# Altium PCB TM.PcbDoc
Units mm, origin at the board's own origin, x right, y up, seen from the top; angles counter-clockwise.
Board outline 73.28 x 49.15 mm, 2 copper layers (Top Layer, Bottom Layer), stack 0.471 mm thick; 13 components, 12 nets, 50 pads, 0 vias.
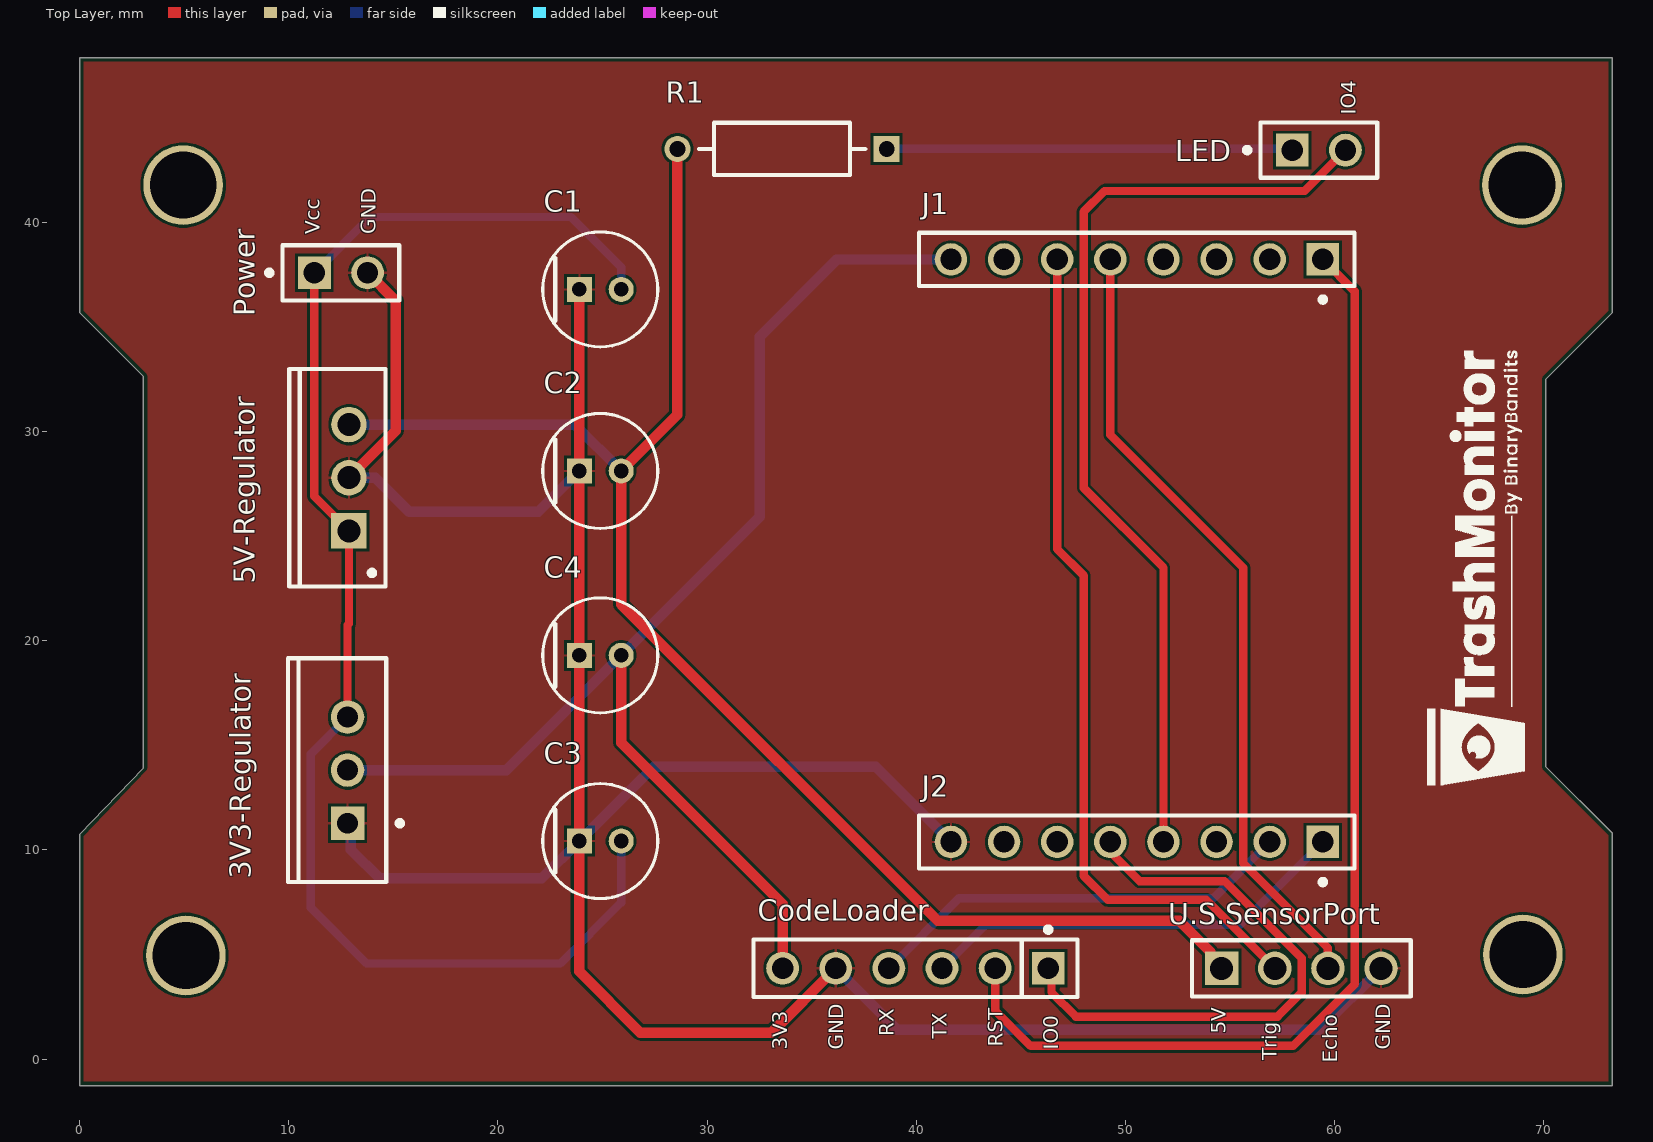
[diagram p0: Top Layer view]
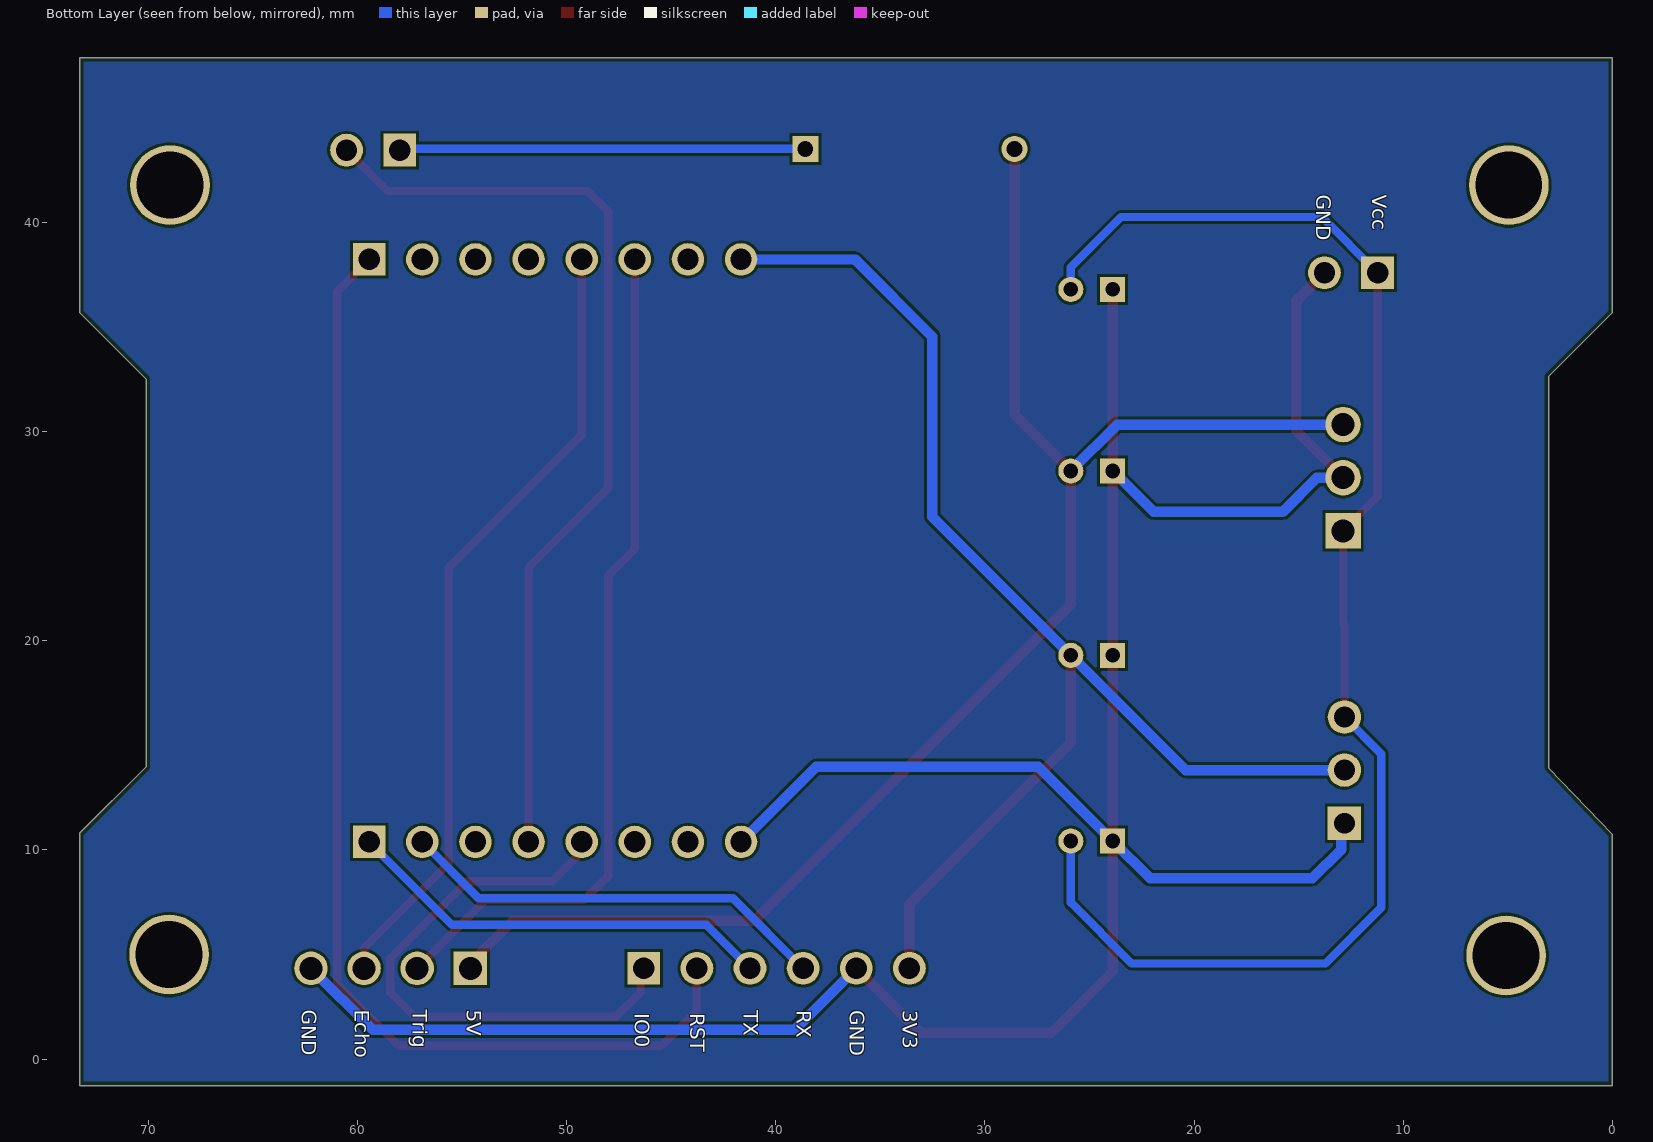
[diagram p1: Bottom Layer view, seen from below]
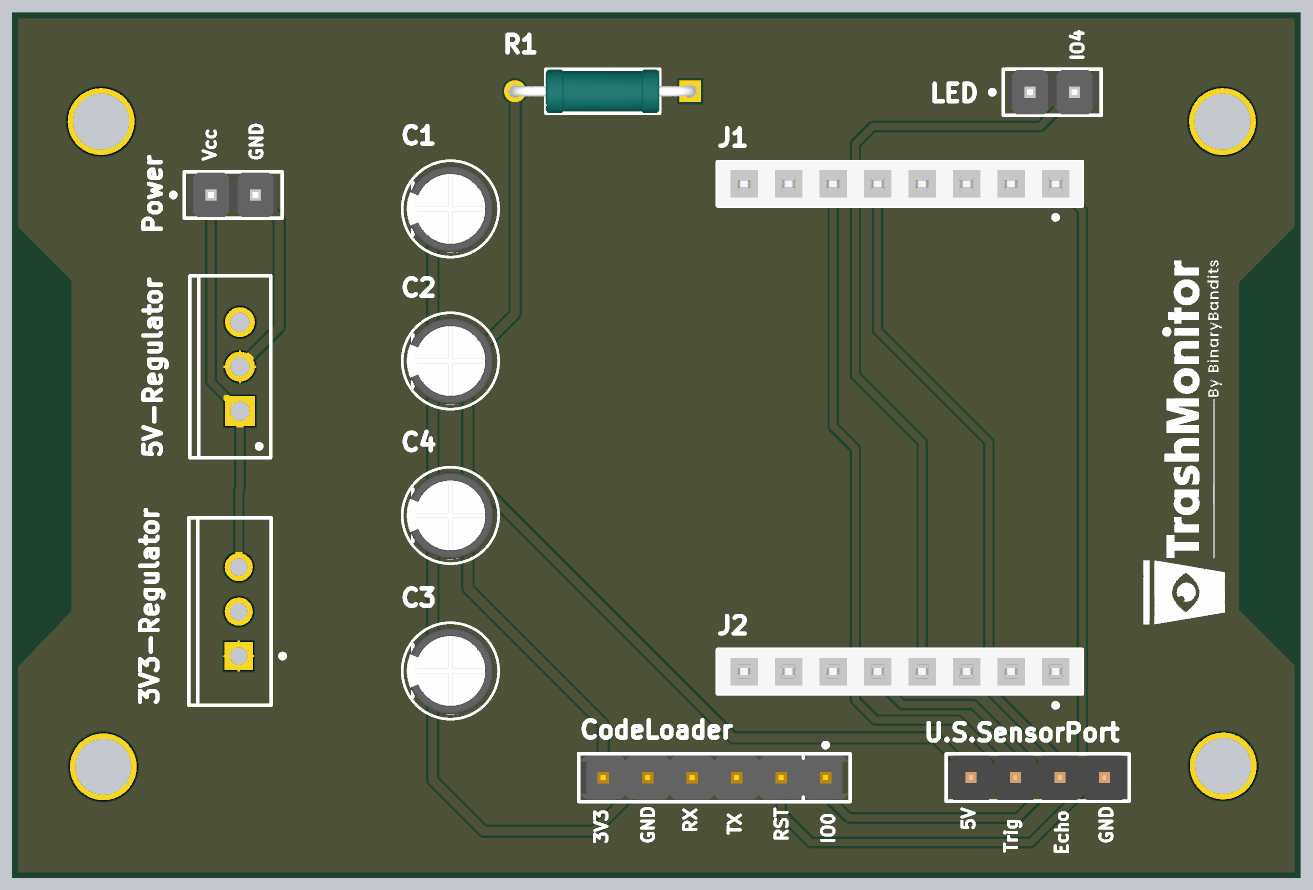
[diagram p2: 3D render of the assembled board from above, using the file's embedded part models]

## Layer stack, top to bottom
Top Solder: solder mask 0.0102, Solder Resist, Dk 3.8
Top Layer: signal copper 0.0356
Dielectric 1: dielectric 0.4, FR-4, Dk 4.5
Bottom Layer: signal copper 0.0356
Bottom Solder: solder mask 0.0102, Solder Resist, Dk 3.8

## Board outline
73.279,35.687 70.104,32.512 70.104,13.97 73.279,10.795 73.279,-1.27 0,-1.27 0,10.742 3.048,13.917 3.048,32.639 0,35.687 0,47.879 73.279,47.879

## Design rules (kind name [scope] priority, off if disabled: settings)
BoardOutlineClearance [All] p1: gap=0.2 ignorepadtopadclearanceinfootprint=FALSE
Clearance [All] p1: gap=0.127 ignorepadtopadclearanceinfootprint=FALSE except(0.25: Arc-Hole Track-Hole SMDPad-Hole THPad-Hole Via-Hole Fill-Hole Poly-Hole Region-Hole Text-Hole)
ComponentClearance [All] p1: gap=0.127 collisioncheckmode=3 verticalgap=0.127 showdistances=TRUE
DiffPairsRouting [All] p1: maxlimit=0.254 minlimit=0.127 mostfreqgap=0.127 toplayer_minwidth=0.127 toplayer_maxwidth=25.4 toplayer_prefwidth=0.127 bottomlayer_minwidth=0.127 bottomlayer_maxwidth=25.4 bottomlayer_prefwidth=0.127 maxuncoupledlength=12.7
Height [All] p1: minheight=0 maxheight=1816.048 prefheight=12.7
HoleSize [All] p1: absolutevalues=TRUE maxlimit=6.3 minlimit=0.3 maxpercent=80.000 minpercent=20.000
HoleToHoleClearance [All] p1: gap=0.25 allowstackedmicrovias=FALSE
MinimumAnnularRing [All] p1: minimumring=0.3
MinimumSolderMaskSliver [All] p1: minsoldermaskwidth=0
PlaneClearance [All] p1: clearance=0.127
PlaneConnect PlaneConnectPowerPads [InPadClass('PowerPads')] p1: planeconnectstyle=Direct reliefexpansion=0.508 reliefentries=4 reliefconductorwidth=0.254 reliefairgap=0.254
PlaneConnect [All] p2: pad.planeconnectstyle=Relief pad.reliefexpansion=0.3 pad.reliefentries=4 pad.reliefconductorwidth=0.127 pad.reliefairgap=0.127 via.planeconnectstyle=Direct via.reliefexpansion=0.3 via.reliefentries=4 via.reliefconductorwidth=0.127 via.reliefairgap=0.127
PolygonConnect PolygonConnectPowerPads [All vs (InPadClass('PowerPads'))] p1: connectstyle=Direct reliefconductorwidth=0.254 reliefentries=4 polygonreliefangle="90 Angle" airgapwidth=0.254
PolygonConnect [All] p2: thpad.connectstyle=Relief thpad.reliefconductorwidth=0.127 thpad.reliefentries=4 thpad.polygonreliefangle="90 Angle" thpad.airgapwidth=0.127 smdpad.connectstyle=Relief smdpad.reliefconductorwidth=0.127 smdpad.reliefentries=4 smdpad.polygonreliefangle="90 Angle" smdpad.airgapwidth=0.127 via.connectstyle=Direct via.reliefconductorwidth=0.127 via.reliefentries=4 via.polygonreliefangle="90 Angle" via.airgapwidth=0.127
RoutingVias [All] p1: holewidth=0.3 width=0.6 viastyle="Through Hole" minholewidth=0.3 minwidth=0.6 maxholewidth=0.6 maxwidth=6.6
SilkToSilkClearance [All] p1: silktosilkclearance=0
SolderMaskExpansion [All] p1: expansion=0.075 istentingtop=FALSE
Width Width_1 [InNet('5V') or InNet('3V3') or InNet('GND')] p1: maxlimit=0.6 minlimit=0.5 preferedwidth=0.5
Width [All] p2: maxlimit=0.5 minlimit=0.4 preferedwidth=0.4
21 further rules are at their usual default settings.

## Components (designator, comment, footprint, x,y, rotation, side; value= is the part's Value field where it differs from the comment)
3V3-Regulator "LM1117T-3.3/NOPB" NDE0003A 12.81,13.814 r90 top (schematic designator "3V3 Regulator")
5V-Regulator "L7805CV" TO220 12.876,27.795 r90 top (schematic designator "5V Regulator")
C1 "EEUHD1H330" FP-RAD-TH-D_5_0_5-L_11_1-MFG 24.892,36.797 r0 top
C2 "EEUHD1H330" FP-RAD-TH-D_5_0_5-L_11_1-MFG 24.892,28.117 r0 top
C3 "EEUHD1H330" FP-RAD-TH-D_5_0_5-L_11_1-MFG 24.892,10.424 r0 top
C4 "EEUHD1H330" FP-RAD-TH-D_5_0_5-L_11_1-MFG 24.892,19.302 r0 top
CodeLoader "22-28-4063" FP-22-28-4063-MFG 39.958,4.34 r180 top
J1 "PPPC081LFBN-RC" SLIN-PPPC081LFBN-RC_V 50.546,38.233 r180 top
J2 "PPPC081LFBN-RC" SLIN-PPPC081LFBN-RC_V 50.546,10.383 r180 top
LED "M20-9990246" FP-M20-9990246-MFG 59.247,43.457 r0 top (schematic designator "Indicator Light")
Power "M20-9990246" FP-M20-9990246-MFG 12.495,37.592 r0 top
R1 "MRS25000C9530FCT00" FP-MRS25-MFG 33.581,43.514 r180 top (schematic designator R6)
U.S.SensorPort "61300411121" 61300411121 58.409,4.34 r0 top (schematic designator "US Sensor port")

## Footprints (in the part's own frame and the unit in brackets; to place one, negate y for a bottom-side part, rotate by r counter-clockwise, add the part's x,y. Pads: shape width x height; smd on the part's side, far side on the other; paste and mask are expansions set on the pad)
61300411121 [mm] "Pin Header, pitch 2.54 mm, THT, Vertical, single row, 4p"
  rect 1.6x1.6 hole 1.1: 1(-3.81,0)
  round 1.6 hole 1.1: 2(-1.27,0) 3(1.27,0) 4(3.81,0)
  silkscreen extent -5.23,-1.34 5.23,1.34, body extent -5.08,-1.27 5.08,1.27, height 8.57
FP-22-28-4063-MFG [mm]
  rect 1.57x1.57 hole 1.02 paste-1000 mask+0: 1(-6.35,0)
  round 1.57 hole 1.02 paste-1000 mask+0: 2(-3.81,0) 3(-1.27,0) 4(1.27,0) 5(3.81,0) 6(6.35,0)
  silkscreen extent -7.75,-1.97 7.75,1.37, body extent -7.85,-1.47 7.85,1.47, height 0.25
FP-M20-9990246-MFG [mm]
  rect 1.57x1.57 hole 1.02 paste-1000 mask+0: 1(-1.27,0)
  round 1.57 hole 1.02 paste-1000 mask+0: 2(1.27,0)
  silkscreen extent -3.55,-1.32 2.79,1.32, body extent -2.89,-1.42 2.89,1.42, height 0.25
FP-MRS25-MFG [mm]
  rect 1.25x1.25 hole 0.75 paste-1000 mask+0: 1(-5,0)
  round 1.25 hole 0.75 paste-1000 mask+0: 2(5,0)
  silkscreen extent -3.98,-1.25 3.97,1.25, body extent -5.72,-1.35 5.72,1.35, height 0.25
FP-RAD-TH-D_5_0_5-L_11_1-MFG [mm]
  rect 1.2x1.2 hole 0.7 paste-1000 mask+0: 1(-1,0)
  round 1.2 hole 0.7 paste-1000 mask+0: 2(1,0)
  silkscreen extent -2.75,-2.75 2.75,2.75, body extent -2.85,-2.85 2.85,2.85, height 0.25
NDE0003A [mm] "FM, 3-Leads, Body 10.7x4.7mm, Pitch 2.54mm"
  rect 1.6x1.6 hole 1: 1(-2.54,0)
  round 1.6 hole 1: 2(0,0) 3(2.54,0)
  silkscreen extent -5.35,-2.63 5.35,2.85, body extent -5.4,-1.9 5.4,2.9, height 19.4
SLIN-PPPC081LFBN-RC_V [mm] "THD, 8-Leads, Body 20.82x2.54mm, Pitch 2.54mm"
  rect 1.55x1.55 hole 1.02: 1(-8.89,0)
  round 1.55 hole 1.02: 2(-6.35,0) 3(-3.81,0) 4(-1.27,0) 5(1.27,0) 6(3.81,0) 7(6.35,0) 8(8.89,0)
  silkscreen extent -10.41,-1.27 10.41,2.04, body extent -10.41,-1.27 10.41,1.27, height 8.5
TO220 [mm] "TO, Thru-Hole, Vertical, Heatsink Mounted; 3 In-Line Leads; Pitch 2.54 mm"
  rect 1.7x1.7 hole 1.1: 1(-2.54,0)
  round 1.7 hole 1.1: 2(0,0) 3(2.54,0)
  silkscreen extent -5.2,-1.75 5.2,2.85, body extent -5.25,-1.8 5.25,2.9, height 19.7

## Part data
3V3-Regulator: library part CMP-0062-02494-3, "800mA Low-Dropout Linear Regulator, 3-pin TO-220, Pb-Free", Manufacturer="Texas Instruments", PackageTopMarking=NSUZXYTTE#*LM1117T*3.3, PowerWise=N, ComponentLink1Description="Datasheet URL", ComponentLink1URL=http://www.ti.com/general/docs/lit/getliterature.tsp?genericPartNumber=LM1117-N&fileType=pdf, CompType="LDO IC", PackageDescription="TO-220, Molded, 3 Lead, Straight", PackageReference=NDE0003A, PinCount=3, RoHS=Y
5V-Regulator: library part CMP-0244-00483-1, "Positive Voltage Regulator, 5V, 3-Pin TO-220", ComponentLink1Description="Manufacturer URL", ComponentLink1URL=http://www.st.com, ComponentLink2Description=Datasheet, ComponentLink2URL=http://www.st.com/internet/com/TECHNICAL_RESOURCES/TECHNICAL_LITERATURE/DATASHEET/CD00000444.pdf, ComponentLink3Description="Package Specification", ComponentLink3URL=http://www.st.com/internet/com/TECHNICAL_RESOURCES/TECHNICAL_LITERATURE/PACKAGE_INFORMATION/CD00004649.pdf, DatasheetVersion=16/11/2011, PackageDescription="TO, Thru-Hole, Vertical, Heatsink Mounted; 3 In-Line Leads; Pitch 2.54 mm", PackageReference=TO220, PackageVersion=ver3.0
C1 C2 C3 C4: library part CMP-05427-001662-1, "Aluminum Electrolytic Capacitors (Radial Lead Type) AEC-Q200 Qualified 33uF ±20% 50V", Capacitance=33uF, Case/Package=Radial, Max Operating Temperature=105°C, Min Operating Temperature=-55°C, Package Quantity=200, Ripple Current=90mA, Tolerance=20%, Voltage=50V, Construction=RADIAL, Diameter=5mm, Height=11mm, Height - Seated (Max)=0.492inch, Lead Diameter=0.5mm, Lead Pitch=2.5mm, Lead/Base Style=Straight, Length=11mm, Life (Hours)=1000Hour, Mount="Through Hole", Packaging=Bulk, Polarity=Polar, REACH SVHC="No SVHC", Ripple Current (AC)=90mA, RoHS Compliant=Yes, Series=HD, Termination=Radial, Voltage Rating=50V, Voltage Rating (DC)=50V
CodeLoader: library part CMP-04776-000885-1, "CONN HEADER VERT 6POS 2.54MM", Color=Black, Contact Resistance=20mR, Current Rating=4A, Flammability Rating="UL94 V-0", Max Operating Temperature=75°C, Max Voltage Rating (AC)=250V, Max Voltage Rating (DC)=250.25kV, Min Operating Temperature=0°C, Package Quantity=1, Connector Type="Male Pin", Contact Material=Brass, Contact Mating Length=0.24inch, Contact Plating=Gold, Contact Type="Male Pin", Depth=2.49mm, Gender=Male, Glow Wire Compliant=Non-compliant, Housing Color=Black, Housing Material=Thermoplastic, Lead Free="Lead Free", Mount="Through Hole", Number of Circuits=6, Number Of Contacts=6, Number of Positions=6, Number Of Rows=1, Orientation=Straight, Packaging=Bulk, Pitch=2.54mm, Radiation Hardening=No, RoHS Compliant=Yes, Series="KK® 42375", Termination=Solder, Voltage Rating=250V, Voltage Rating (DC)=250V
J1 J2: library part CMP-1770-00002-1, "Female Header, Pitch 2.54 mm, 1 x 8 Position, Height 8.5 mm, Tail Length 3.2 mm, -40 to 105 degC, RoHS, Bulk", Case\Package=TO-252-3, Input Capacitance="350 pF", Max Operating Temperature="150 degC", Max Power Dissipation="2.5 W", Min Operating Temperature="-55 degC", Package Quantity=2500, ComponentLink1Description=Datasheet, ComponentLink1URL=http://sullinscorp.com/catalogs/101_PAGE114-115_.100_FEMALE_HDR.pdf, DatasheetVersion=Jan-15, Elements=1, Height="2.39 mm", Length="6.73 mm", Mount="Surface Mount", PackageDescription="Female Header, Pitch 2.54 mm, 1 x 8 Position, Height 8.5 mm, Tail Length 3.2 mm", PackageReference=PPPC081LFBN-RC, Packaging="Tape and Reel", Pins=3, Radiation Hardening=No, Rds On Max="115 mohm", REACH SVHC="No SVHC", RoHSCompliant=true, Typical Rise Time="90 ns", Width="6.22 mm"
LED Power: library part CMP-15831-000009-1, "CONN HEADER VERT 2POS 2.54MM", Current Rating=3A, Manufacturer=Harwin, Temperature="-40°C to +105°C", Temperature Range High=+105°C, Temperature Range Low=-40°C, Automotive=No, Category=Conn, ComponentLink2Description=Datasheet, ComponentLink2URL=https://cdn.harwin.com/pdfs/M20-999.pdf, Conn Gender=Male, Conn Orientation=Vertical, Contact Material=Tin,Nickel, Device Class L1=Connectors, Device Class L2="Headers and Wire Housings", Device Class L3=unset, Digikey Description="CONN HEADER VERT 2POS 2.54MM", Height=8.99mm, Lead Free=Yes, Manufacturer Part Number=M20-9990246, Mouser Description="2.54mm (0.1\") Pitch SIL Vertical PC Tail Pin Header, 6.1mm mating pin height, tin, 2 contacts", Number Of Contacts=2, Number Of Rows=1, Octopart=https://octopart.com/m20-9990246-harwin-2590635, Package=M20-9990246, Pitch=2.54mm, RoHS=TRUE
R1: library part CMP-02408-000049-1, "RES 953 OHM 0.6W 1% AXIAL", Case/Package=Axial, Max Operating Temperature=155°C, Max Power Dissipation=600mW, Min Operating Temperature=-55°C, Resistance=953R, Resistance Tolerance=1%, Resistor Type="Metal Film", Temperature Coefficient=50ppm/°C, Voltage Rating=350V, Construction=Cylindrical, Contact Plating=Tin, Diameter=2.5mm, Lead Free="Lead Free", Lead Length=26mm, Length=6.5mm, Military Standard=Not, Number of Terminations=2, Packaging="Tape and Reel", Power Rating=600mW, Radiation Hardening=No, RoHS Compliant=Yes, Series=MRS25, Technology="THIN FILM", Termination=Axial, Tolerance=1%, Width=2.5mm
U.S.SensorPort: library part CMP-1502-01064-1, "THT Vertical Pin Header WR-PHD, Pitch 2.54 mm, Single Row, 4 pins", Contact Resistance=20mOhm, Manufacturer="Wurth Elektronik", Operating Temperature=-40to105degC, Rated Current=3A, Withstanding Voltage=500VAC, Working Voltage=250VAC, Datasheet URL=https://katalog.we-online.de/em/datasheet/6130xx11121.pdf, Gender=Male, Manufacturer URL=http://www.we-online.de, Mounting Technology=THT, Orientation=Vertical, Package Reference=61300411121, Packaging=Bag, Part Number=61300411121, Pin Number=4, Pitch=2.54mm, Publisher=WurthElektronik, Row Number=Single

## Free pads (board coordinates)
  round 3.81 hole 3.2: 4(4.953,41.783) 5(68.961,41.783) 6(5.08,4.953) 7(69,5)

## Nets (pads, with @x,y where several pads share a name; then routed paths per layer and width w, separated by ;. In a path a pad name is that pad's centre, name@x,y a point inside that pad or via, vN(x,y) a via of type N, cw(c..) or ccw(c..) an arc to the next point about the centre after c; other vN are vias at no path point)
3V3: 3V3-Regulator.2 C4.2 CodeLoader.6 J1.8 | length 62.2
  Top Layer w0.5: C4.2 25.892,15.129 33.608,7.413 CodeLoader.6
  Bottom Layer w0.5: 3V3-Regulator.2 20.404,13.814 C4.2 32.512,25.922 32.512,34.544 36.195,38.227 J1.8@41.684,38.227
5V: 5V-Regulator.3 C2.2 R1.2 U.S.SensorPort.1 | length 72.9
  Top Layer w0.5: R1.2 28.581,30.806 C2.2 25.892,21.733 41.021,6.604 52.578,6.604 54.049,5.133 54.049,4.89 U.S.SensorPort.1
  Bottom Layer w0.5: 5V-Regulator.3 23.674,30.335 C2.2
Echo: J1.5 U.S.SensorPort.3 | length 38.2
  Top Layer w0.4: J1.5 49.276,29.845 55.626,23.495 55.626,9.367 59.679,5.314 U.S.SensorPort.3
GND: 3V3-Regulator.1 5V-Regulator.2 C1.1 C2.1 C3.1 C4.1 CodeLoader.5 J2.8 Power.2 U.S.SensorPort.4 | length 133.9
  Top Layer w0.5: 5V-Regulator.2 15.113,30.032 15.113,36.244 Power.2 ; C1.1 C2.1 C4.1 C3.1 23.876,10.409 23.876,4.191 26.797,1.27 33.077,1.27 CodeLoader.5
  Bottom Layer w0.5: 3V3-Regulator.1 12.97,11.114 12.97,10.017 14.351,8.636 22.103,8.636 C3.1 27.437,13.97 38.069,13.97 J2.8 ; 5V-Regulator.2 12.888,27.783 14.127,27.783 15.748,26.162 21.937,26.162 C2.1 ; CodeLoader.5 39.091,1.397 59.275,1.397 U.S.SensorPort.4
IO0: CodeLoader.1 J2.5 | length 27.5
  Top Layer w0.4: CodeLoader.1 46.467,4.181 46.467,3.19 47.625,2.032 57.277,2.032 58.42,3.175 58.42,4.826 54.737,8.509 50.673,8.509 49.496,9.686 49.496,10.163 J2.5
IO4: J2.4 LED.2 | length 45.4
  Top Layer w0.4: J2.4 51.816,23.495 48.006,27.305 48.006,40.513 48.997,41.504 58.563,41.504 LED.2
"NetIndicator Light_1": LED.1 R1.1 | length 19.4
  Bottom Layer w0.4: R1.1 57.92,43.514 LED.1
RST: CodeLoader.2 J1.1 | length 56.4
  Top Layer w0.4: CodeLoader.2 43.768,2.333 45.466,0.635 58.02,0.635 60.96,3.575 60.96,36.709 J1.1
RX: CodeLoader.4 J2.2 | length 20.7
  Bottom Layer w0.4: CodeLoader.4 42.037,7.69 54.203,7.69 J2.2
Trig: J1.6 U.S.SensorPort.2 | length 41
  Top Layer w0.4: J1.6 46.736,24.384 48.006,23.114 48.006,8.763 49.149,7.62 53.859,7.62 U.S.SensorPort.2
TX: CodeLoader.3 J2.1 | length 20.7
  Bottom Layer w0.4: CodeLoader.3 43.307,6.42 55.473,6.42 J2.1
VCC: 3V3-Regulator.3 5V-Regulator.1 C1.2 C3.2 Power.1 | length 69.7
  Top Layer w0.4: Power.1 11.225,26.906 5V-Regulator.1 12.876,20.818 12.81,20.752 3V3-Regulator.3
  Bottom Layer w0.4: Power.1 13.892,40.259 23.495,40.259 25.892,37.862 C1.2 ; 3V3-Regulator.3 11.049,14.593 11.049,7.239 13.716,4.572 22.987,4.572 25.892,7.477 C3.2
pads on no net: J1.2 J1.3 J1.4 J1.7 J2.3 J2.6 J2.7

## Polygon pours and split planes (outlines as drawn)
no net on Bottom Layer "NONET_L02_P001" (solid, pour order 1): 75.057,50.927 76.835,-3.048 -2.985,-4.255 -2.985,50.863
GND on Top Layer "GND_L01_P002" (solid, pour order 2): -2.223,48.641 75.311,49.149 76.454,-3.048 -1.778,-2.159 -2.223,0.952

## Silkscreen, mask and mechanical layers (free items; w line width, h text height)
Top Overlay:
  drawing of 34 lines, arcs and shapes, not listed
  text "IO4" at 61.014,45.158 h0.7 r90
  text "Vcc" at 11.484,39.443 h0.7 r90
  text "GND" at 14.151,39.443 h0.7 r90
  text "5V" at 54.791,1.216 h0.7 r90
  text "RX" at 38.916,1.089 h0.7 r90
  text "TX" at 41.456,0.962 h0.7 r90
  text "RST" at 44.123,0.581 h0.7 r90
  text "3V3" at 33.836,0.454 h0.7 r90
  text "GND" at 36.503,0.454 h0.7 r90
  text "IO0" at 46.79,0.454 h0.7 r90
  text "GND" at 62.665,0.454 h0.7 r90
  text "Trig" at 57.225,-0.054 h0.7 r90
  text "Echo" at 60.125,-0.181 h0.7 r90
Bottom Overlay:
  text "Vcc" at 11.484,41.329 h0.7 r90
  text "GND" at 14.151,41.329 h0.7 r90
  text "5V" at 54.78,2.362 h0.7 r90
  text "Trig" at 57.341,2.362 h0.7 r90
  text "Echo" at 60.114,2.362 h0.7 r90
  text "GND" at 62.654,2.362 h0.7 r90
  text "3V3" at 33.916,2.33 h0.7 r90
  text "GND" at 36.456,2.33 h0.7 r90
  text "RX" at 38.996,2.33 h0.7 r90
  text "TX" at 41.536,2.33 h0.7 r90
  text "RST" at 44.076,2.203 h0.7 r90
  text "IO0" at 46.743,2.203 h0.7 r90
Board:
  lines w0.254: 0,-1.27 0,10.742 3.048,13.79 3.048,32.639 0,35.687 0,47.879 73.279,47.879 73.279,35.687 70.104,32.512 70.104,13.97 73.279,10.795 73.279,-1.27 0,-1.27